# Altium PCB TLE5012B.PcbDoc
Units mm, origin at the board's own origin, x right, y up, seen from the top; angles counter-clockwise.
Board outline 23.75 x 23.5 mm, 2 copper layers (Top Layer, Bottom Layer); 7 components, 9 nets, 30 pads, 18 vias.
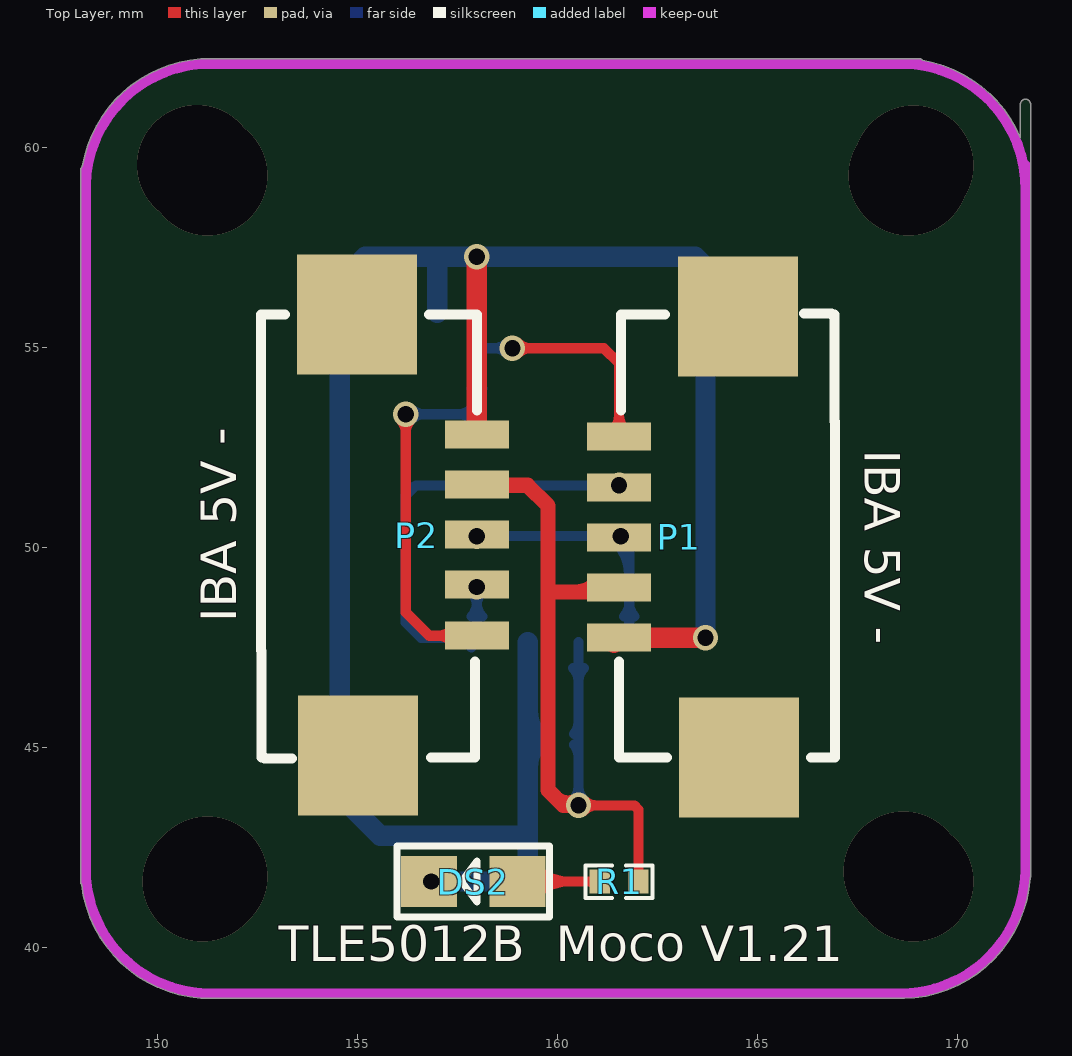
[diagram p0: Top Layer view]
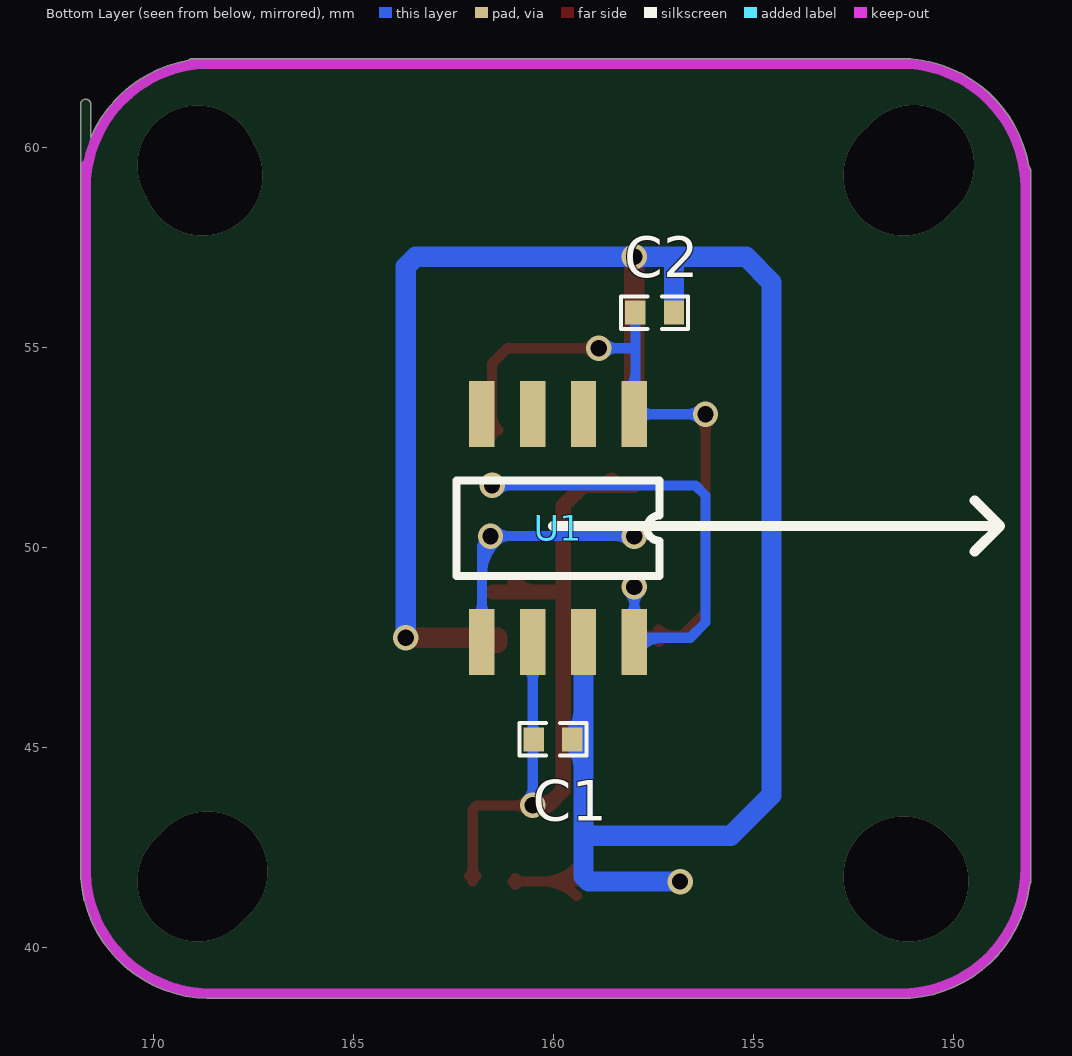
[diagram p1: Bottom Layer view, seen from below]
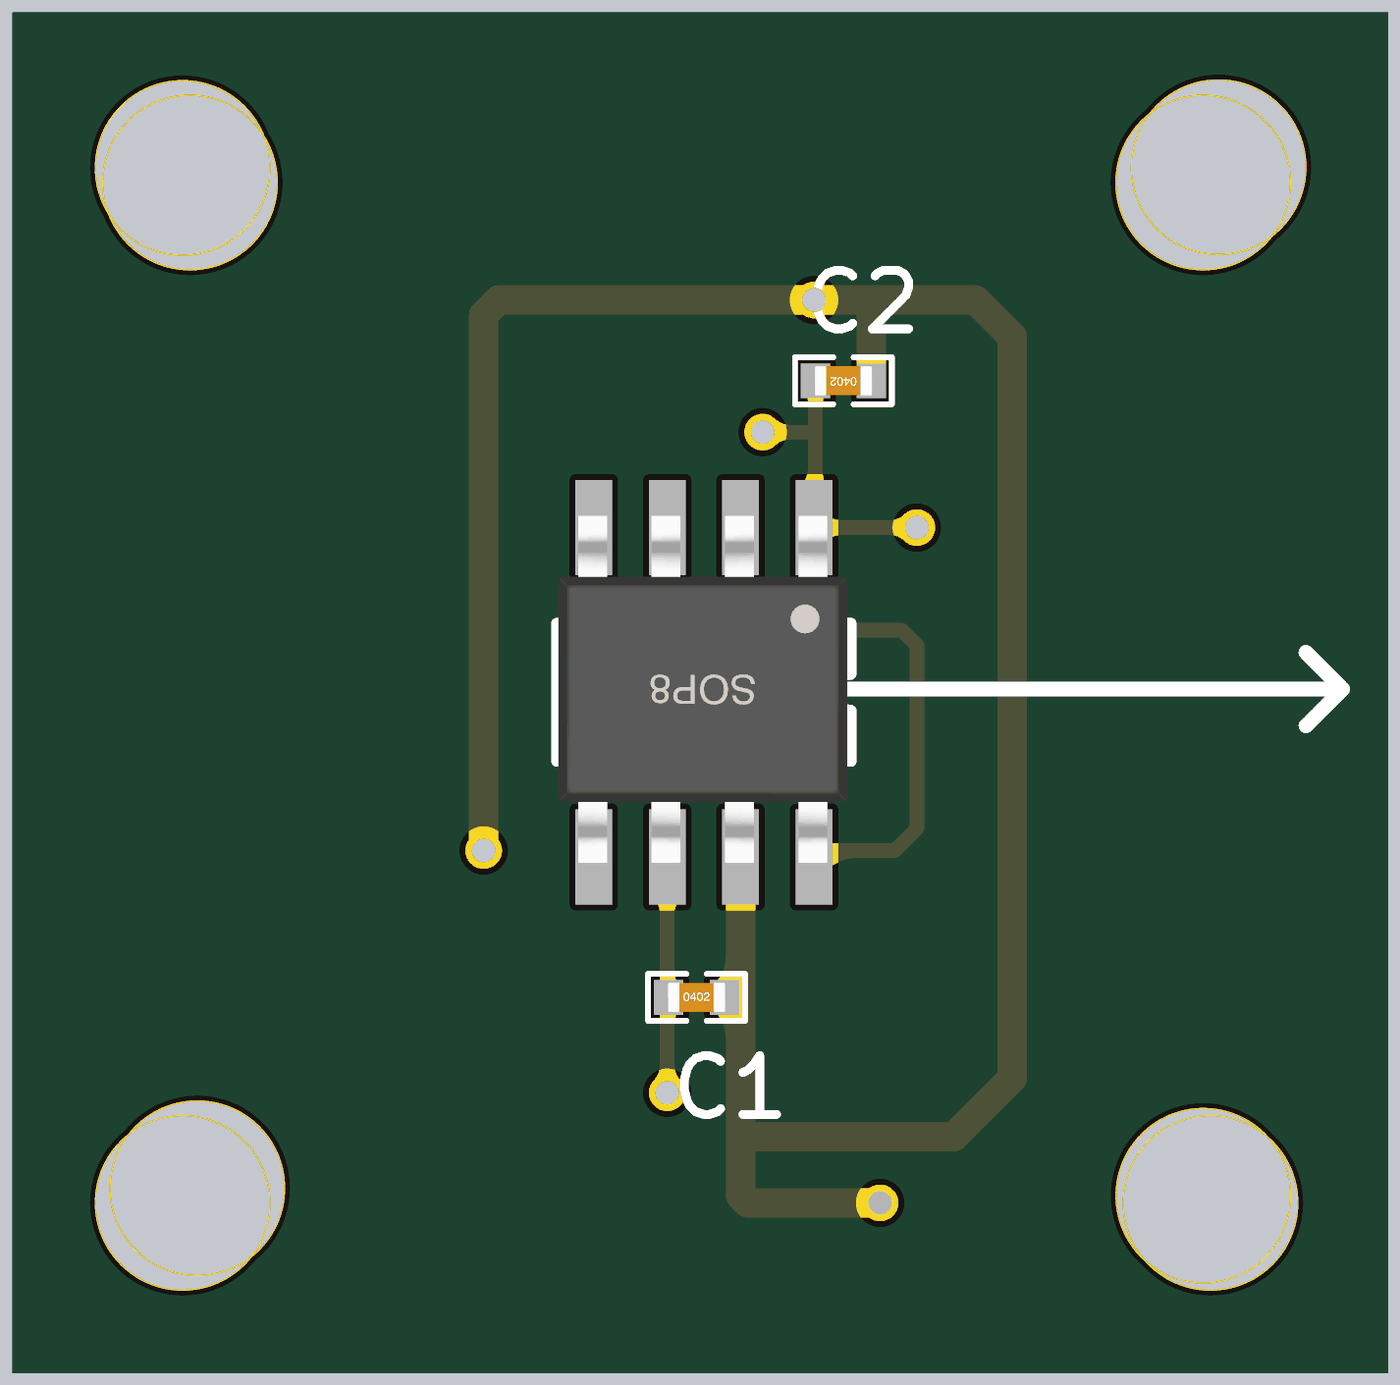
[diagram p2: 3D render of the assembled board from below, using the file's embedded part models]

## Layer stack, top to bottom
Top Layer: signal copper 0.0356
Dielectric: dielectric 0.32, FR-4, Dk 4.8
Bottom Layer: signal copper 0.0356

## Board outline
148.082,41.656 148.082,41.909 cw(c151.32,41.974) 148.082,42.038 148.082,59.436 cw(c148.209,59.436) 148.127,59.533 cw(c151.32,58.991) 151.086,62.223 cw(c151.13,62.103) 151.13,62.23 151.256,62.23 cw(c151.32,58.991) 151.385,62.23 cw(c151.32,58.991) 151.387,62.23 151.385,62.23 169.037,62.23 cw(c169.037,62.103) 169.134,62.185 cw(c168.593,58.991) 171.577,60.252 171.577,61.087 cw(c171.704,61.087) 171.831,61.087 171.831,59.056 cw(c168.593,58.991) 171.832,58.991 cw(c168.593,58.991) 171.831,58.927 171.831,41.783 cw(c171.704,41.783) 171.824,41.739 cw(c168.593,41.974) 168.659,38.735 cw(c168.593,41.974) 168.528,38.735 cw(c168.593,41.974) 168.526,38.735 168.528,38.735 151.13,38.735 cw(c151.13,38.862) 151.086,38.742 cw(c151.32,41.974) 148.105,41.583 cw(c148.209,41.656)

## Design rules (kind name [scope] priority, off if disabled: settings)
Clearance [All] p1: gap=0.254
PolygonConnect [All] p1: connectstyle=Relief reliefconductorwidth=0.254 reliefentries=4 polygonreliefangle="90 Angle"
RoutingVias [All] p1: holewidth=0.711 width=1.27 viastyle="Through Hole" minholewidth=0.406 minwidth=0.635 maxholewidth=0.711 maxwidth=1.27
SilkscreenOverComponentPads [All] p1: minsilkscreentomaskgap=0.254
SolderMaskExpansion [All] p1: expansion=0.102
Width [All] p1: maxlimit=0.508 minlimit=0.254 preferedwidth=0.254 minimp=50.000000 maximp=50.000000 favimp=50.000000
27 further rules are at their usual default settings.

## Components (designator, comment, footprint, x,y, rotation, side; value= is the part's Value field where it differs from the comment)
C1 "100nF" "C 0402" 160.02,45.212 r180 bottom
C2 "22nF" "C 0402" 157.48,55.88 r0 bottom
DS2 "LED1" SMDLED 159.004,41.656 r180 top
P1 "Header 5" PH1.25_5 161.544,47.752 r90 top
P2 "Header 5" PH1.25_5 157.988,52.832 r270 top
R1 "470R" "R 0402" 161.544,41.656 r180 top
U1 "TLE5012B" SOP-8 157.988,53.34 r270 bottom

## Footprints (in the part's own frame and the unit in brackets; to place one, negate y for a bottom-side part, rotate by r counter-clockwise, add the part's x,y. Pads: shape width x height; smd on the part's side, far side on the other; paste and mask are expansions set on the pad)
"C 0402" [mil]
  rect 20x23.62 smd: 1(-19,0) 2(19,0)
  silkscreen extent -33,-16 33,16, body extent -20,-10 20,10, height 20
PH1.25_5 [mm]
  rect 0.7x1.6 smd: 1(0,0) 2(1.25,0) 3(2.5,0) 4(3.75,0) 5(5.029,0)
  rect 3x3 smd: ""(-3,-3) ""(8.026,-2.972)
  silkscreen extent -3,-5.4 8.1,0
"R 0402" [mil]
  rect 20x23.62 smd: 1(-19,0) 2(19,0)
  silkscreen extent -33,-16 33,16, body extent -20,-10 20,10, height 12
SMDLED [mm]
  rect 1.4x1.27 smd: 1(0.001,-0.002) 2(2.211,-0.002)
  silkscreen extent -0.8,-0.89 3.01,0.89
SOP-8 [mil]
  rect 65x25 smd: 1(0,0) 2(0,-50) 3(0,-100) 4(0,-150) 5(224.41,-150) 6(224.41,-100) 7(224.41,-50) 8(224.41,0)
  silkscreen extent 65,-175 159,25, body extent -8,-174 228,23, height 75

## Part data
C1 C2: library part CAP, "Capacitor"
DS2: library part LED2, "Typical RED, GREEN, YELLOW, AMBER GaAs LED"
P1 P2: "Header, 5-Pin"
R1: library part Res2, "0603"
U1: library part 24C256

## Via types
v1: diameter 0.635, hole 0.406, Top Layer to Bottom Layer, 10 vias
v2: diameter 3, hole 3, Top Layer to Bottom Layer, 8 vias

## Nets (pads, with @x,y where several pads share a name; then routed paths per layer and width w, separated by ;. In a path a pad name is that pad's centre, name@x,y a point inside that pad or via, vN(x,y) a via of type N, cw(c..) or ccw(c..) an arc to the next point about the centre after c; other vN are vias at no path point)
A: P1.3 P2.3 U1.5 | length 10
  Top Layer w0.254: P1.3 v1(161.584,50.292)
  Bottom Layer w0.254: v1(157.988,50.292) v1@161.544,50.292 ; v1@158.123,50.157 cw(c158.448,49.832) 158.448,50.292 cw(c158.448,50.752) v1@158.123,50.427 ; v1@161.449,50.427 cw(c161.124,50.752) 161.124,50.292 cw(c161.124,49.832) 161.449,50.157 cw(c160.607,49.315) 161.798,49.315 ; v1(161.584,50.292) v1@161.544,50.292 ; v1@161.629,50.337 cw(c161.221,49.929) 161.798,49.929 ; U1.5@161.663,48.283 ccw(c161.338,48.608) 161.798,48.608 ccw(c162.258,48.608) U1.5@161.933,48.283 ; U1.5 161.798,50.038 v1@161.544,50.292
B: P1.4 P2.4 U1.8 | length 14.7
  Top Layer w0.254: P2.4 P2.4@157.988,49.149 ; P1.4 v1(161.544,51.562)
  Bottom Layer w0.254: 157.258,47.752 cw(c157.258,46.91) U1.8@157.853,47.505 ; U1.8@157.853,48.283 ccw(c157.528,48.608) 157.988,48.608 ccw(c158.448,48.608) U1.8@158.123,48.283 ; v1@157.853,48.887 cw(c157.528,48.562) 157.988,48.562 cw(c158.448,48.562) v1@158.123,48.887 ; U1.8@157.861,47.752 156.591,47.752 156.21,48.133 156.21,51.308 156.464,51.562 v1(161.544,51.562) ; v1@157.988,49.149 157.988,48.006 U1.8@158.115,47.879 ; v1@161.409,51.427 ccw(c161.084,51.102) 161.084,51.562 ccw(c161.084,52.022) v1@161.409,51.697
  other v1: 157.988,49.022
CS: U1.3
DATA: U1.4
GND: C1.2 C2.1 DS2.2 P1.1 P2.1 U1.7 | length 54.8
  Top Layer w0.508: P2.1 v1(157.988,57.277) ; P1.1@161.417,47.625 161.417,47.752 P1.1 v1(163.703,47.752)
  Bottom Layer w0.508: v1(156.845,41.656) 159.131,41.656 159.258,41.783 159.258,42.799 ; C2.1 156.997,57.252 156.972,57.277 ; 159.258,44.491 cw(c160.212,44.491) C1.2@159.537,45.166 ; 159.258,45.933 ccw(c160.212,45.933) C1.2@159.537,45.258 ; U1.7 159.258,42.799 ; v1(163.703,47.752) 163.703,57.023 163.449,57.277 v1(157.988,57.277) 156.972,57.277 ; 156.972,57.277 155.194,57.277 154.559,56.642 154.559,43.815 155.575,42.799 159.258,42.799
I: C2.2 P1.5 P2.5 U1.1 | length 23.5
  Top Layer w0.254: v1@156.075,53.205 cw(c155.75,52.88) 156.21,52.88 cw(c156.67,52.88) v1@156.345,53.205 ; v1(156.21,53.34) 156.21,48.387 156.794,47.803 P2.5 ; P2.5@157.38,47.645 ccw(c157,47.264) 157,47.803 ccw(c157,48.341) P2.5@157.38,47.96 ; v1(158.877,54.991) 161.163,54.991 161.544,54.61 P1.5 ; v1@159.012,54.856 cw(c159.337,54.531) 159.337,54.991 cw(c159.337,55.451) v1@159.012,55.126 ; P1.5@161.386,52.939 ccw(c161.006,53.32) 161.544,53.32 ccw(c162.082,53.32) P1.5@161.702,52.939
  Bottom Layer w0.254: v1(156.21,53.34) U1.1 U1.1@158.115,53.213 ; v1@156.345,53.205 cw(c156.67,52.88) 156.67,53.34 cw(c156.67,53.8) v1@156.345,53.475 ; U1.1@157.853,53.205 ccw(c157.528,52.88) 157.528,53.34 ccw(c157.528,53.8) U1.1@157.853,53.475 ; U1.1@157.853,53.983 ccw(c157.589,54.247) 157.963,54.247 ; C2.2@157.873,55.744 cw(c157.656,55.527) 157.963,55.527 cw(c158.269,55.527) C2.2@158.052,55.744 ; 157.963,54.369 ccw(c158.509,54.369) U1.1@158.123,53.983 ; C2.2 157.963,53.619 U1.1@158.115,53.467 ; 157.988,54.991 v1(158.877,54.991) ; v1@158.742,54.856 ccw(c158.417,54.531) 158.417,54.991 ccw(c158.417,55.451) v1@158.742,55.126
NetDS2_1: DS2.1 R1.2 | length 4.4
  Top Layer w0.254: DS2.1 161.034,41.658 R1.2@161.036,41.656 ; DS2.1@159.427,41.298 cw(c160.295,40.431) 160.295,41.658 cw(c160.295,42.884) DS2.1@159.427,42.017 ; 160.751,41.658 cw(c160.751,41.345) R1.2@160.972,41.566 ; 160.759,41.658 ccw(c160.759,41.959) R1.2@160.972,41.746
SCK: U1.2
VCC: C1.1 P1.2 P2.2 R1.1 U1.6 | length 24
  Top Layer w0.254: v1@160.655,43.561 161.925,43.561 162.027,43.459 R1.1 ; v1@160.663,43.426 cw(c160.988,43.101) 160.988,43.561 cw(c160.988,44.021) v1@160.663,43.696 ; R1.1@161.937,41.792 ccw(c161.72,42.009) 162.027,42.009 ccw(c162.333,42.009) R1.1@162.116,41.792
  Top Layer w0.381: P2.2@157.988,51.562 159.258,51.562 159.766,51.054 159.766,48.895 ; P2.2@158.551,51.695 ccw(c158.871,52.015) 158.871,51.562 ; 159.766,48.768 159.766,48.895 ; 159.957,43.751 ccw(c160.266,44.061) v1@160.469,43.673 ; 160.451,48.895 ccw(c160.451,49.645) P1.2@160.981,49.115 ; v1(160.528,43.561) 160.147,43.561 159.766,43.942 159.766,48.895 ; P1.2@161.544,48.895 159.766,48.895
  Bottom Layer w0.254: v1@160.393,43.696 ccw(c160.068,44.021) 160.528,44.021 ccw(c160.988,44.021) v1@160.663,43.696 ; U1.6@160.393,46.997 cw(c160.068,46.672) 160.528,46.672 cw(c160.988,46.672) U1.6@160.663,46.997 ; C1.1@160.413,45.076 cw(c160.135,44.798) 160.528,44.798 ; C1.1@160.413,45.348 ccw(c160.135,45.626) 160.528,45.626 ; v1(160.528,43.561) U1.6
pads on no net: P1. P2.
copper on no net:
  other v2: 151.13,41.656 168.91,41.656 151.254,41.78 168.656,41.91 151.257,59.309 168.783,59.309 150.99,59.576 168.91,59.563

## Keep-outs
Keep-Out Layer:
  lines w0.254: 148.209,41.656 148.209,59.436 ; 148.209,42.037 ccw(c151.32,41.974) 151.257,38.862 ; 148.209,59.055 cw(c151.32,58.991) 151.384,62.103 ; 151.13,38.862 168.656,38.862 ; 151.13,62.103 169.037,62.103 ; 168.529,38.862 ccw(c168.593,41.974) 171.704,41.91 ; 168.656,62.103 cw(c168.593,58.991) 171.704,58.928 ; 171.704,41.783 171.704,59.563

## Silkscreen, mask and mechanical layers (free items; w line width, h text height)
Top Overlay:
  text "IBA 5V -" at 167.386,52.451 h1.52 r270
  text "IBA 5V -" at 152.273,48.133 h1.52 r90
  text "TLE5012B  Moco V1.21" at 153.035,39.37 h1.52
Bottom Overlay:
  lines w0.254: 149.479,49.911 148.844,50.546 ; 149.479,51.181 148.844,50.546 ; 160.02,50.546 148.844,50.546